# Altium PCB VESC1PCB.PcbDoc
Units mm, origin at the board's own origin, x right, y up, seen from the top; angles counter-clockwise.
Board outline 50 x 50 mm, 2 copper layers (Top Layer, Bottom Layer); 75 components, 42 nets, 238 pads, 17 vias.
Unrouted connection lines stored in the file: 41.
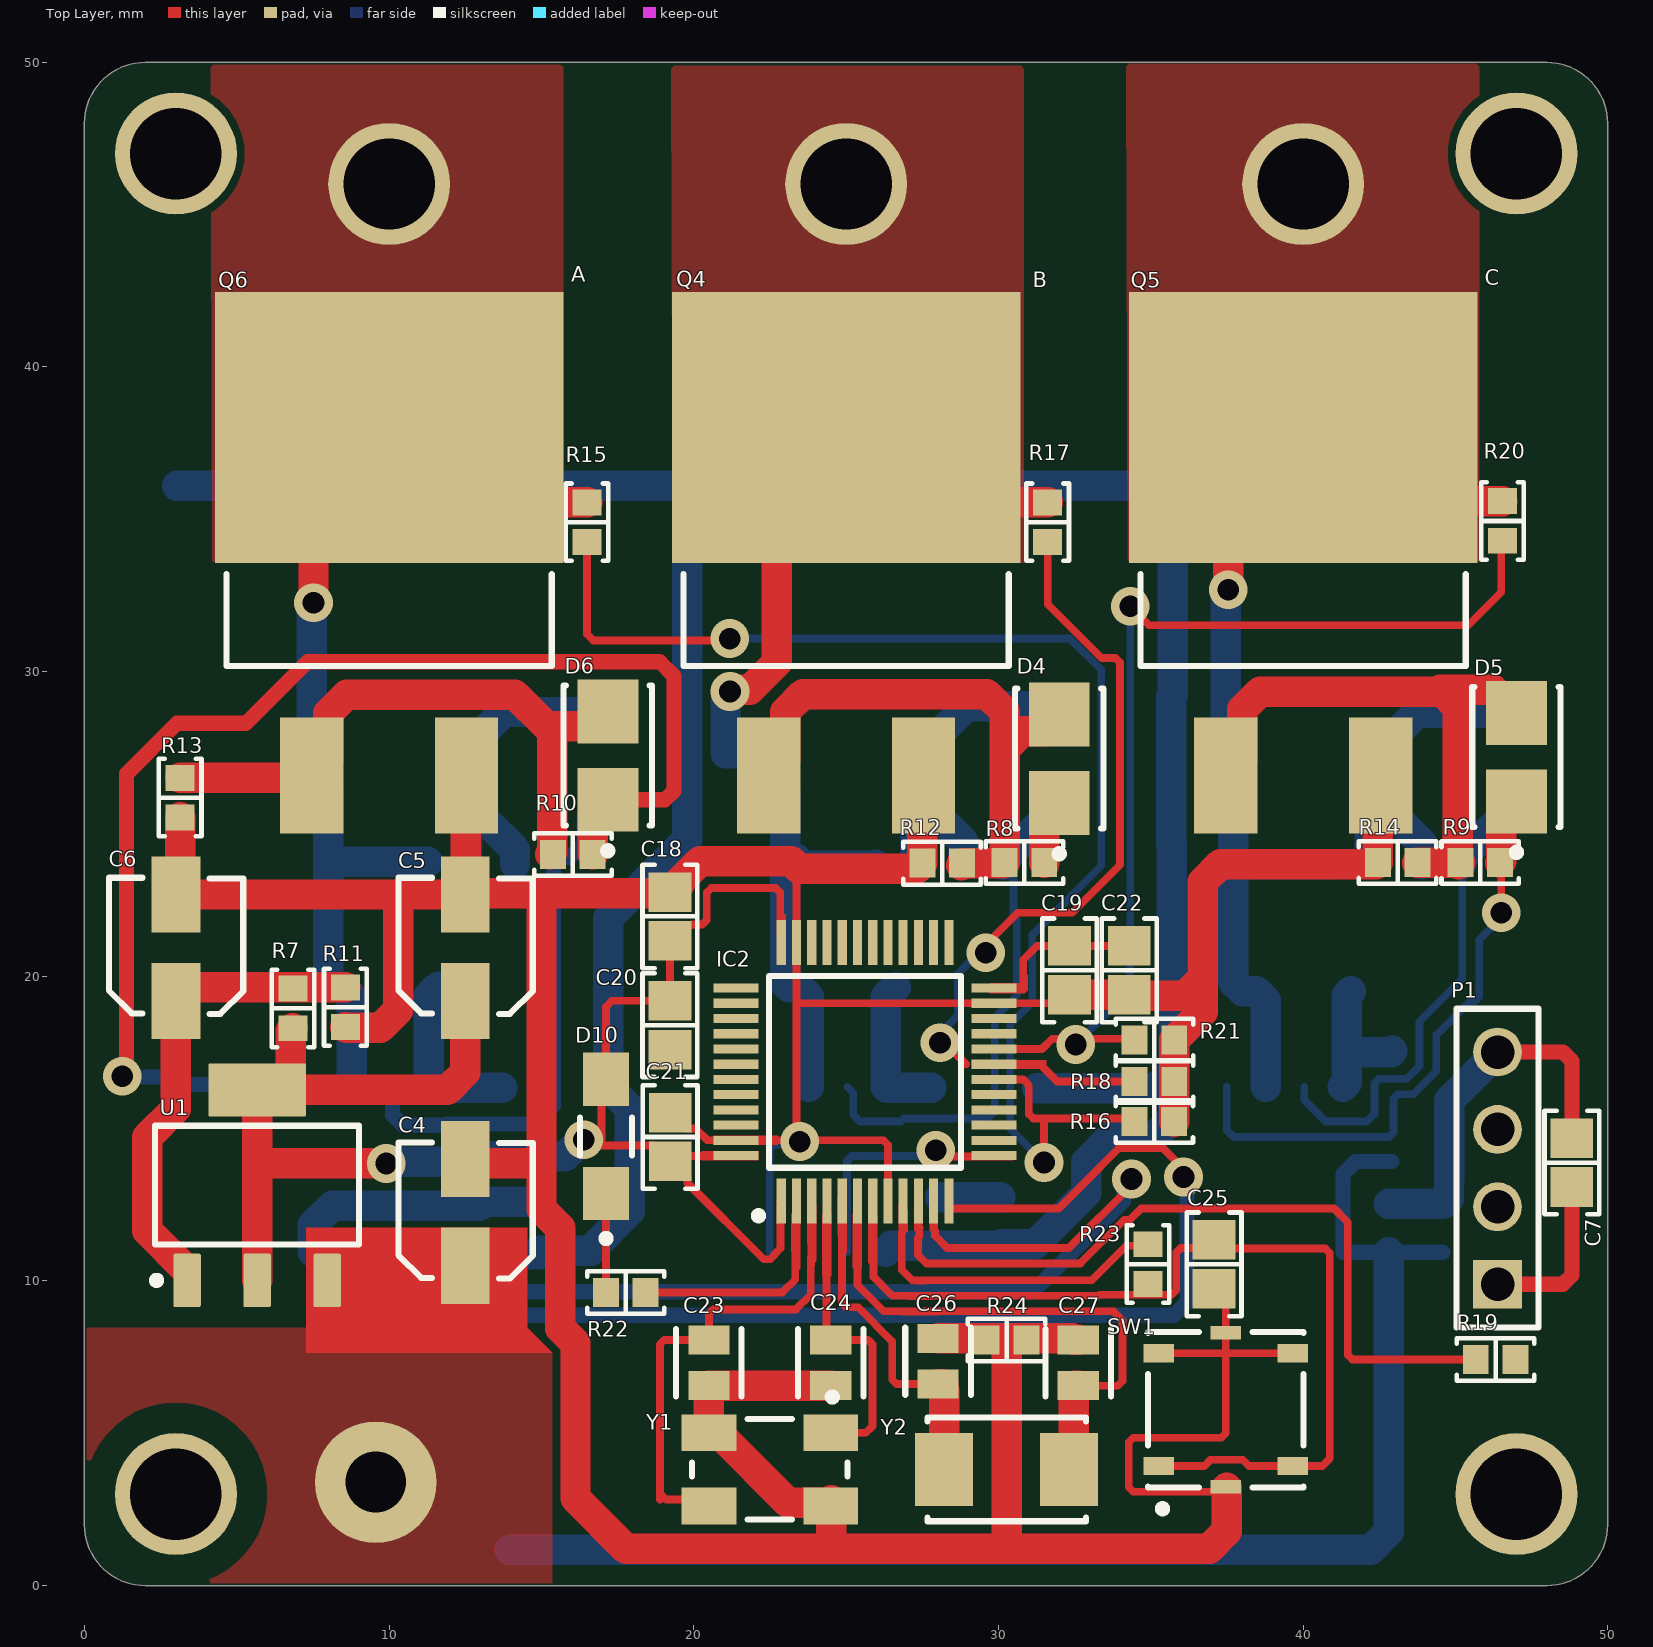
[diagram p0: Top Layer view]
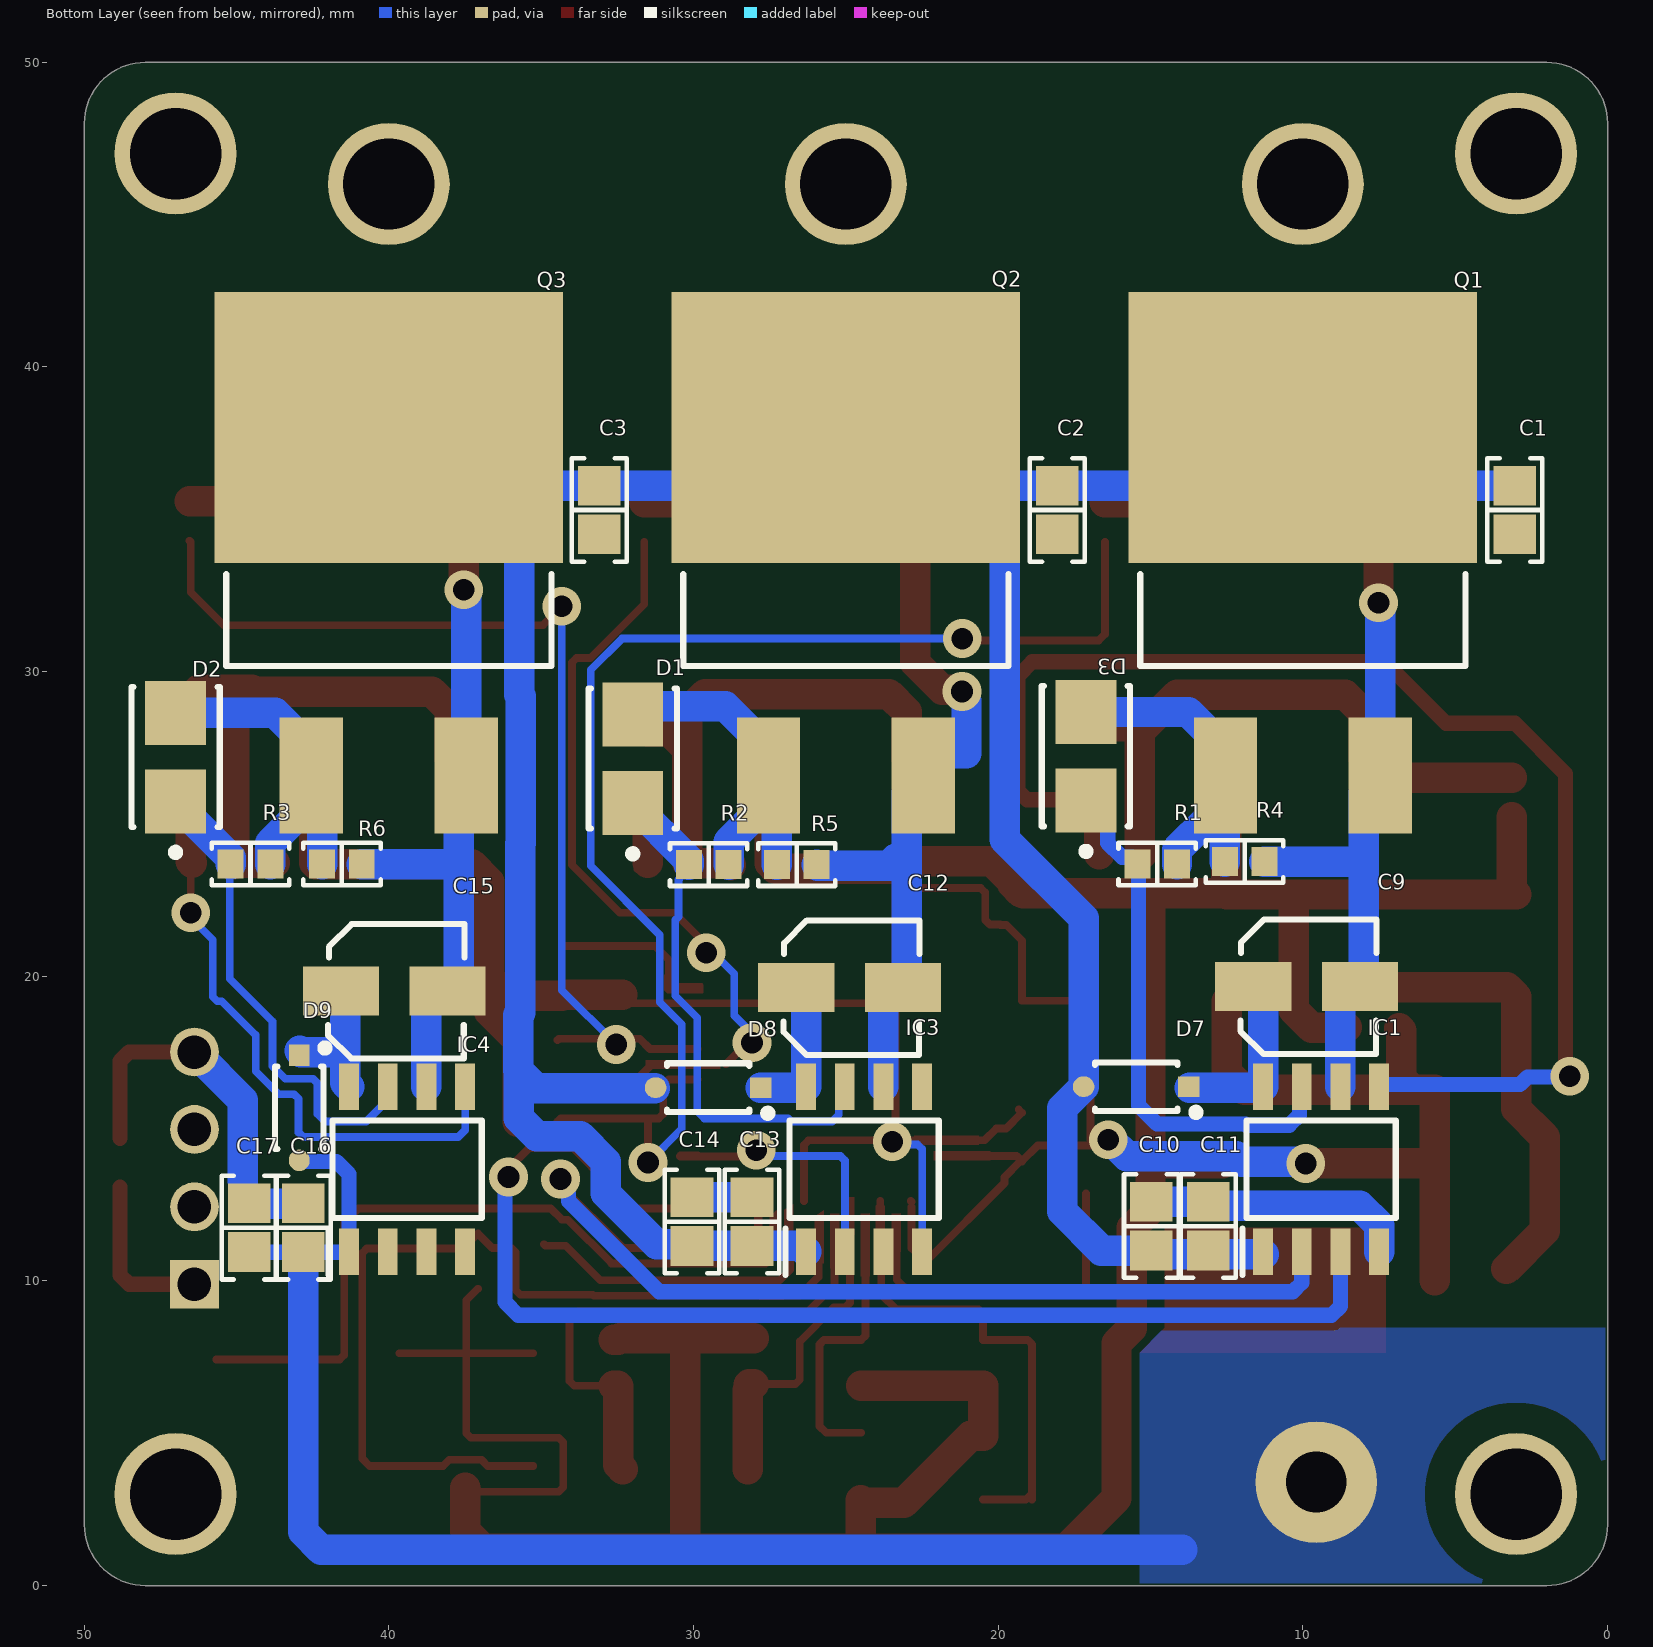
[diagram p1: Bottom Layer view, seen from below]
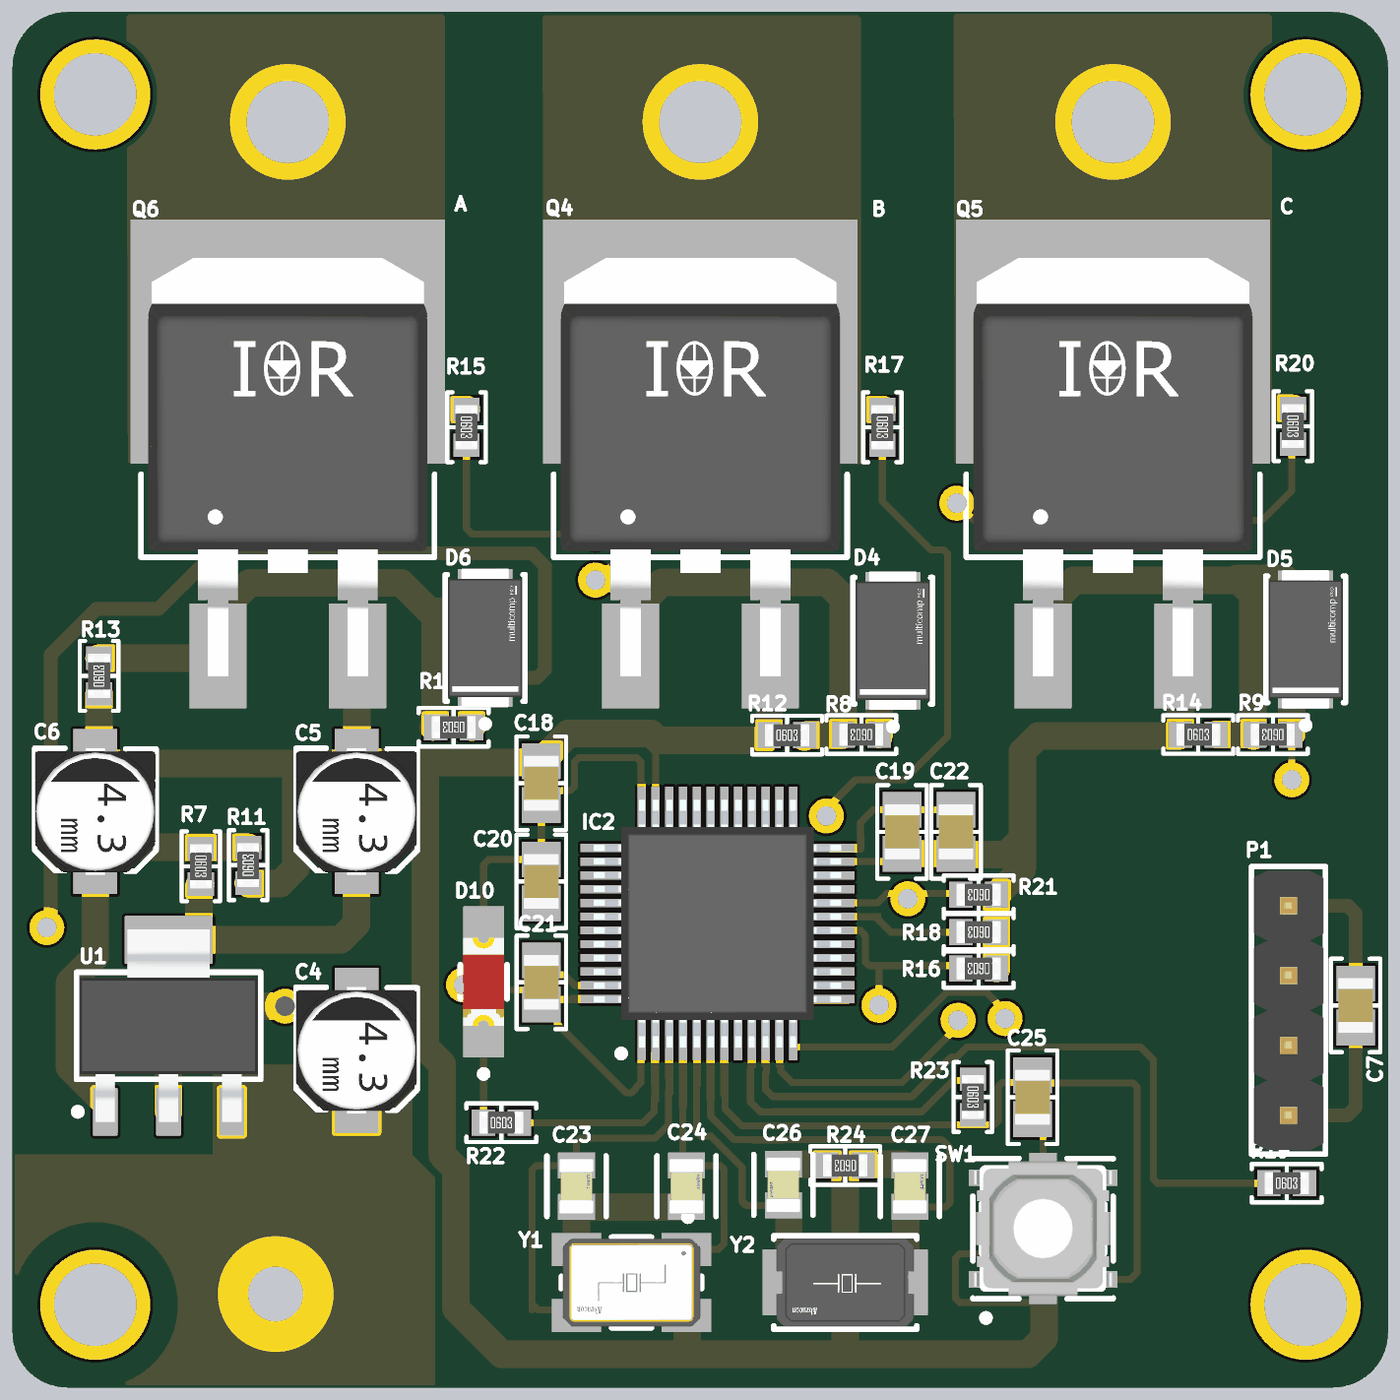
[diagram p2: 3D render of the assembled board from above, using the file's embedded part models]
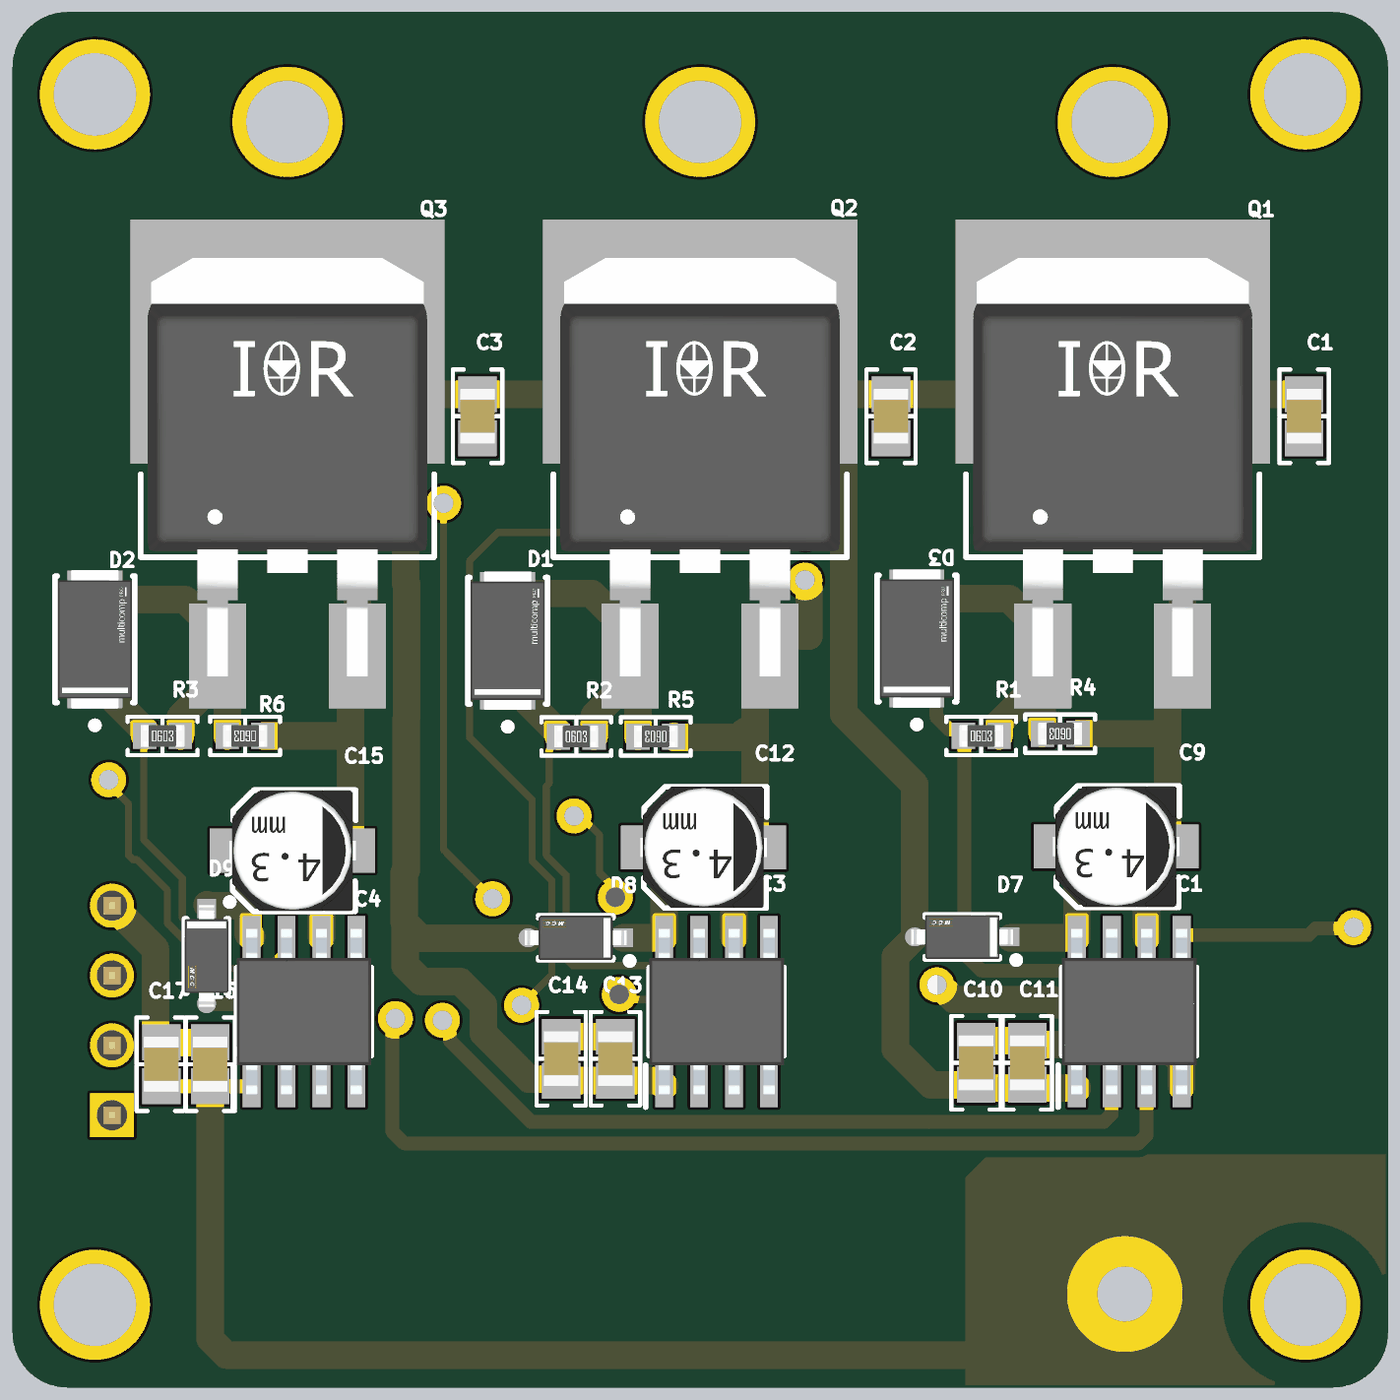
[diagram p3: 3D render of the assembled board from below, using the file's embedded part models]

## Layer stack, top to bottom
Top Solder: solder mask 0.0102, Solder Resist, Dk 3.5
Top Layer: signal copper 0.0356
Dielectric 1: dielectric 0.32, FR-4, Dk 4.8
Bottom Layer: signal copper 0.0356
Bottom Solder: solder mask 0.0102, Solder Resist, Dk 3.5

## Board outline
-0.006,1.994 ccw(c1.994,1.994) 1.994,-0.006 47.994,-0.006 ccw(c47.994,1.994) 49.994,1.994 49.994,47.994 ccw(c47.994,47.994) 47.994,49.994 1.994,49.994 ccw(c1.994,47.994) -0.006,47.994

## Design rules (kind name [scope] priority, off if disabled: settings)
Clearance [All] p1: gap=0.254 ignorepadtopadclearanceinfootprint=FALSE except(0: Arc-Hole Track-Hole SMDPad-Hole THPad-Hole Via-Hole Fill-Hole Poly-Hole Region-Hole Text-Hole)
PolygonConnect PolygonConnect_3 [All vs IsNamedPolygon('C_L01_P006')] p1: thpad.connectstyle=Direct thpad.reliefconductorwidth=0.254 thpad.reliefentries=4 thpad.polygonreliefangle="90 Angle" thpad.airgapwidth=0.254 smdpad.connectstyle=Direct smdpad.reliefconductorwidth=0.254 smdpad.reliefentries=4 smdpad.polygonreliefangle="90 Angle" smdpad.airgapwidth=0.254 via.connectstyle=Relief via.reliefconductorwidth=0.254 via.reliefentries=4 via.polygonreliefangle="90 Angle" via.airgapwidth=0.254
PolygonConnect PolygonConnect_2 [All vs IsNamedPolygon('B_L01_P005')] p2: thpad.connectstyle=Direct thpad.reliefconductorwidth=0.254 thpad.reliefentries=4 thpad.polygonreliefangle="90 Angle" thpad.airgapwidth=0.254 smdpad.connectstyle=Direct smdpad.reliefconductorwidth=0.254 smdpad.reliefentries=4 smdpad.polygonreliefangle="90 Angle" smdpad.airgapwidth=0.254 via.connectstyle=Relief via.reliefconductorwidth=0.254 via.reliefentries=4 via.polygonreliefangle="90 Angle" via.airgapwidth=0.254
PolygonConnect PolygonConnect_1 [All vs IsNamedPolygon('A_L01_P004')] p3: thpad.connectstyle=Direct thpad.reliefconductorwidth=0.254 thpad.reliefentries=4 thpad.polygonreliefangle="90 Angle" thpad.airgapwidth=0.254 smdpad.connectstyle=Direct smdpad.reliefconductorwidth=0.254 smdpad.reliefentries=4 smdpad.polygonreliefangle="90 Angle" smdpad.airgapwidth=0.254 via.connectstyle=Relief via.reliefconductorwidth=0.254 via.reliefentries=4 via.polygonreliefangle="90 Angle" via.airgapwidth=0.254
PolygonConnect [All] p4: connectstyle=Relief reliefconductorwidth=0.254 reliefentries=4 polygonreliefangle="90 Angle" airgapwidth=0.254
RoutingVias [All] p1: holewidth=0.711 width=1.27 viastyle="Through Hole" minholewidth=0.711 minwidth=1.27 maxholewidth=0.711 maxwidth=1.27
SolderMaskExpansion [All] p1: expansion=0.102 istentingtop=FALSE
Width [All] p1: maxlimit=1 minlimit=0.254 preferedwidth=0.5 minimp=50.000000 maximp=50.000000 favimp=50.000000
30 further rules are at their usual default settings.

## Components (designator, comment, footprint, x,y, rotation, side; value= is the part's Value field where it differs from the comment)
C1 "100 µF" "CAP 0805_2012" 3.04,35.3 r270 bottom
C2 "100 µF" "CAP 0805_2012" 18.06,35.3 r270 bottom
C3 "100 µF" "CAP 0805_2012" 33.091,35.3 r270 bottom
C4 "10uF" "CAP ALSMD 4.3MM H5.4MM" 12.5,12.244 r90 top
C5 "100uF" "CAP ALSMD 4.3MM H5.4MM" 12.5,20.93 r90 top
C6 "=Value" "CAP ALSMD 4.3MM H5.4MM" 3,20.93 r90 top
C7 "0.1 µF" "CAP 0805_2012" 48.82,13.88 r90 top
C9 "10 µF" "CAP ALSMD 4.3MM H5.4MM" 9.878,19.658 r180 bottom
C10 "10 µF" "CAP 0805_2012" 14.97,11.795 r270 bottom
C11 "10 µF" "CAP 0805_2012" 13.105,11.795 r270 bottom
C12 "10 µF" "CAP ALSMD 4.3MM H5.4MM" 24.876,19.63 r180 bottom
C13 "10 µF" "CAP 0805_2012" 28.08,11.944 r270 bottom
C14 "10 µF" "CAP 0805_2012" 30.05,11.944 r270 bottom
C15 "10 µF" "CAP ALSMD 4.3MM H5.4MM" 39.82,19.51 r180 bottom
C16 "10 µF" "CAP 0805_2012" 42.81,11.745 r270 bottom
C17 "10 µF" "CAP 0805_2012" 44.586,11.745 r270 bottom
C18 "0.1 µF" "CAP 0805_2012" 19.215,21.96 r270 top
C19 "0.1 µF" "CAP 0805_2012" 32.331,20.192 r90 top
C20 "0.1 µF" "CAP 0805_2012" 19.215,18.39 r90 top
C21 "0.1 µF" "CAP 0805_2012" 19.22,14.72 r270 top
C22 "0.1 µF" "CAP 0805_2012" 34.291,20.192 r90 top
C23 "10pF" FP-C0805C-DN-MFG 20.495,7.31 r270 top value="10 pF"
C24 "10pF" FP-C0805C-DN-MFG 24.495,7.31 r270 top value="10 pF"
C25 "0.1 µF" "CAP 0805_2012" 37.075,10.544 r90 top
C26 "10pF" FP-C0805C-DN-MFG 28.015,7.36 r90 top value="10 pF"
C27 "10pF" FP-C0805C-DN-MFG 32.615,7.31 r270 top value="10 pF"
D1 "1N4007 SMD" FP-1N4007_SMD-IPC_C 31.994,27.14 r90 bottom
D2 "1N4007 SMD" FP-1N4007_SMD-IPC_C 47,27.19 r90 bottom
D3 "1N4007 SMD" FP-1N4007_SMD-IPC_C 17.12,27.22 r90 bottom
D4 "1N4007 SMD" FP-1N4007_SMD-IPC_C 31.994,27.14 r90 top
D5 "1N4007 SMD" FP-1N4007_SMD-IPC_C 47,27.19 r90 top
D6 "1N4007 SMD" FP-1N4007_SMD-IPC_C 17.175,27.24 r90 top
D7 "MBR0560-TP" FP-SOD-123-IPC_C 15.47,16.372 r0 bottom
D8 "MBR0560-TP" FP-SOD-123-IPC_C 29.52,16.34 r0 bottom
D9 "MBR0560-TP" FP-SOD-123-IPC_C 42.94,15.68 r270 bottom
D10 "CMD15-21VRD/TR8" FP-CMD15-21-MFG 17.12,14.74 r90 top
IC1 "IR2101STRPBF" SOIC127P600X175-8N 9.4,13.66 r90 bottom
IC2 "STM32F103C8T7" QFP50P900X900X160-48N 25.62,16.86 r90 top
IC3 "IR2101STRPBF" SOIC127P600X175-8N 24.4,13.66 r90 bottom
IC4 "IR2101STRPBF" SOIC127P600X175-8N 39.4,13.66 r90 bottom
P1 "61300411121" 61300411121 46.38,13.7 r90 top
Q1 "IRF3205STRLPBF" FP-PG-TO263-3-MFG 10,35 r180 bottom
Q2 "IRF3205STRLPBF" FP-PG-TO263-3-MFG 25,35 r180 bottom
Q3 "IRF3205STRLPBF" FP-PG-TO263-3-MFG 40,35 r180 bottom
Q4 "IRF3205STRLPBF" FP-PG-TO263-3-MFG 25,35 r0 top
Q5 "IRF3205STRLPBF" FP-PG-TO263-3-MFG 40,35 r0 top
Q6 "IRF3205STRLPBF" FP-PG-TO263-3-MFG 10,35 r0 top
R1 "10 Ohms" "RES 0603_1608" 14.78,23.68 r180 bottom
R2 "10 Ohms" "RES 0603_1608" 29.5,23.66 r180 bottom
R3 "10 Ohms" "RES 0603_1608" 44.54,23.68 r180 bottom
R4 "2k Ohms" "RES 0603_1608" 11.91,23.76 r0 bottom
R5 "2k Ohms" "RES 0603_1608" 26.61,23.66 r0 bottom
R6 "2k Ohms" "RES 0603_1608" 41.54,23.68 r0 bottom
R7 "10 Ohms" "RES 0603_1608" 6.84,18.94 r270 top
R8 "10 Ohms" "RES 0603_1608" 30.85,23.728 r180 top
R9 "10 Ohms" "RES 0603_1608" 45.81,23.728 r180 top
R10 "10 Ohms" "RES 0603_1608" 16.029,23.997 r180 top
R11 "16 Ohms" "RES 0603_1608" 8.56,18.98 r90 top
R12 "2k Ohms" "RES 0603_1608" 28.15,23.707 r0 top
R13 "2k Ohms" "RES 0603_1608" 3.14,25.86 r90 top
R14 "2k Ohms" "RES 0603_1608" 43.1,23.73 r0 top
R15 "7k Ohms" "RES 0603_1608" 16.495,34.9 r270 top
R16 "2k Ohms" "RES 0603_1608" 35.113,15.226 r180 top
R17 "7k Ohms" "RES 0603_1608" 31.614,34.9 r270 top
R18 "2k Ohms" "RES 0603_1608" 35.117,16.546 r180 top
R19 "16 Ohms" "RES 0603_1608" 46.314,7.42 r0 top
R20 "7k Ohms" "RES 0603_1608" 46.54,34.94 r270 top
R21 "2k Ohms" "RES 0603_1608" 35.117,17.905 r180 top
R22 "510 Ohms" "RES 0603_1608" 17.765,9.62 r0 top
R23 "16 Ohms" "RES 0603_1608" 34.905,10.55 r270 top
R24 "1M Ohms" "RES 0603_1608" 30.264,8.06 r180 top
SW1 "EVQ-PLMA15" FP-EVQ-PLMA15-MFG 37.455,5.77 r90 top
U1 "LM1117MPX-ADJ/NOPB" DCY0004A_N 5.666,13.14 r90 top
Y1 "ABM3B-155-12.800MHZ-T" FP-ABM3B-MFG 22.495,3.81 r180 top
Y2 "ABM3-8.000MHZ-D2Y-T" FP-ABM3-MFG 30.265,3.81 r180 top

## Footprints (in the part's own frame and the unit in brackets; to place one, negate y for a bottom-side part, rotate by r counter-clockwise, add the part's x,y. Pads: shape width x height; smd on the part's side, far side on the other; paste and mask are expansions set on the pad)
61300411121 [mm] "Pin Header, pitch 2.54 mm, THT, Vertical, single row, 4p"
  rect 1.6x1.6 hole 1.1: 1(-3.81,0)
  round 1.6 hole 1.1: 2(-1.27,0) 3(1.27,0) 4(3.81,0)
  silkscreen extent -5.23,-1.35 5.23,1.35, body extent -5.08,-1.27 5.08,1.27, height 8.57
"CAP 0805_2012" [mm] "Chip Capacitor, 2-Leads, Body 2.00x1.20mm, IPC Medium Density"
  rect 1.3x1.4 smd: 1(-0.8,0) 2(0.8,0)
  silkscreen extent -1.7,-0.9 1.7,0.9, body extent -1,-0.64 1,0.64, height 1.26
"CAP ALSMD 4.3MM H5.4MM" [mm] "Aluminum Electrolytic Capacitor, Body 4.30x4.30x5.40mm, IPC Low Density"
  rect 2.5x1.6 smd: 1(-1.75,0) 2(1.75,0)
  silkscreen extent -2.17,-2.21 2.3,2.2, body extent -2.3,-2.2 2.3,2.2, height 5.4
DCY0004A_N [mm] "SOT223, 4-Leads, Body 6.7x3.7mm, Pitch 2.3mm, IPC Medium Density"
  rrect11% 1.75x0.9 smd: 1(-3.125,2.3) 2(-3.125,0) 3(-3.125,-2.3)
  rrect6% 1.75x3.2 smd: 4(3.125,0)
  silkscreen extent -3.25,-3.35 1.95,3.42, body extent -3.5,-3.25 3.5,3.25, height 1.62
FP-1N4007_SMD-IPC_C [mm]
  rect 2.1x2 smd paste+0 mask+0: 1(-1.45,0) 2(1.45,0)
  silkscreen extent -3.25,-1.45 2.3,1.45, body extent -2.52,-1.35 2.52,1.35, height 2.62
FP-ABM3-MFG [mm]
  rect 1.9x2.4 smd paste+0 mask+0: 1(-2.05,0) 2(2.05,0)
  silkscreen extent -2.6,-1.7 2.6,1.7, body extent -3.1,-1.8 3.1,1.8, height 0.25
FP-ABM3B-MFG [mm]
  rect 1.8x1.2 smd paste+0 mask+0: 1(-2,-1.2) 2(2,-1.2) 3(2,1.2) 4(-2,1.2)
  silkscreen extent -2.55,-2.5 2.55,1.65, body extent -3,-1.9 3,1.9, height 0.25
FP-C0805C-DN-MFG [mm]
  rect 0.95x1.35 smd paste+0 mask+0: 1(-0.75,0) 2(0.75,0)
  silkscreen extent -1.1,-1.07 1.1,1.07, body extent -1.4,-0.85 1.4,0.85, height 0.25
FP-CMD15-21-MFG [mm]
  rect 1.75x1.5 smd paste+0 mask+0: 1(-1.875,0) 2(1.875,0)
  silkscreen extent -3.47,-0.85 0.63,0.85, body extent -2.85,-0.95 2.85,0.95, height 0.25
FP-EVQ-PLMA15-MFG [mm]
  rect 0.45x1 smd paste+0 mask+0: 1(-2.525,0) 2(2.525,0)
  rect 0.6x1 smd paste+0 mask+0: A(-1.85,2.2) A'(-1.85,-2.2) B(1.85,2.2) B'(1.85,-2.2)
  silkscreen extent -3.37,-2.55 2.55,2.55, body extent -2.85,-2.8 2.85,2.8, height 0.25
FP-PG-TO263-3-MFG [mm]
  rect 2.08x3.81 smd paste+0 mask+0: 1(-2.54,-8.417) 3(2.54,-8.417)
  rect 11.43x8.89 smd paste+0 mask+0: 2(0,3.013)
  silkscreen extent -5.34,-4.82 5.34,-1.81, body extent -5.08,-9.2 5.08,6.05, height 5.09
FP-SOD-123-IPC_C [mm]
  rect 0.708x0.682 smd paste+0 mask+0: 1(-1.725,0)
  rrect100% 0.708x0.682 smd paste+0 mask+0: 2(1.725,0)
  silkscreen extent -2.09,-0.8 1.35,0.97, body extent -1.85,-0.8 1.85,0.8, height 1.35
QFP50P900X900X160-48N [mm]
  rect 1.475x0.3 smd: 1(-4.238,2.75) 2(-4.238,2.25) 3(-4.238,1.75) 4(-4.238,1.25) 5(-4.238,0.75) 6(-4.238,0.25) 7(-4.238,-0.25) 8(-4.238,-0.75) 9(-4.238,-1.25) 10(-4.238,-1.75) 11(-4.238,-2.25) 12(-4.238,-2.75) 25(4.238,-2.75) 26(4.238,-2.25) 27(4.238,-1.75) 28(4.238,-1.25) 29(4.238,-0.75) 30(4.238,-0.25) 31(4.238,0.25) 32(4.238,0.75) 33(4.238,1.25) 34(4.238,1.75) 35(4.238,2.25) 36(4.238,2.75)
  rect 0.3x1.475 smd: 13(-2.75,-4.238) 14(-2.25,-4.238) 15(-1.75,-4.238) 16(-1.25,-4.238) 17(-0.75,-4.238) 18(-0.25,-4.238) 19(0.25,-4.238) 20(0.75,-4.238) 21(1.25,-4.238) 22(1.75,-4.238) 23(2.25,-4.238) 24(2.75,-4.238) 37(2.75,4.238) 38(2.25,4.238) 39(1.75,4.238) 40(1.25,4.238) 41(0.75,4.238) 42(0.25,4.238) 43(-0.25,4.238) 44(-0.75,4.238) 45(-1.25,4.238) 46(-1.75,4.238) 47(-2.25,4.238) 48(-2.75,4.238)
  silkscreen extent -4.85,-3.15 3.15,3.62, body extent -4.5,-4.5 4.5,4.5, height 1.6
"RES 0603_1608" [mm] "Chip Resistor, 2-Leads, Body 1.60x0.80mm, IPC Medium Density"
  rect 0.85x0.95 smd: 1(-0.65,0) 2(0.65,0)
  silkscreen extent -1.27,-0.7 1.27,0.7, body extent -0.8,-0.4 0.8,0.4, height 0.45
SOIC127P600X175-8N [mm]
  rect 1.525x0.65 smd: 1(-2.712,1.905) 2(-2.712,0.635) 3(-2.712,-0.635) 4(-2.712,-1.905) 5(2.712,-1.905) 6(2.712,-0.635) 7(2.712,0.635) 8(2.712,1.905)
  silkscreen extent -3.47,-2.45 1.6,2.58, body extent -3,-2.45 3,2.45, height 1.75

## Part data
C1 C2 C3: library part PMK212BBJ107MG-T, "CAP CER 100UF 2.5V X5R 0805", Device Package="0805 (2012 Metric)", Manufacturer="Taiyo Yuden", Operating Temperature="-55°C ~ 85°C", Supplier Part Number 1=587-3978-1-ND, Temperature Coefficient=X5R, Tolerance=±20%, Voltage - Rated=2.5V, Applications="SMPS Filtering", Capacitance="100 µF", ComponentLink1Description=Datasheet, ComponentLink1URL="https://ds.yuden.co.jp/TYCOMPAS/ut/detail?pn=PMK212BBJ107MG-T  &u=M", ComponentLink2Description="DigiKey Link", ComponentLink2URL=https://www.digikey.com/en/products/detail/taiyo-yuden/PMK212BBJ107MG-T/4950524, LastUpdated="23.05.2022 12:57:57", Lifecycle Status=Active, Minimum Order=1, Mounting Type="Surface Mount, MLCC", Package / Case="0805 (2012 Metric)", Packaging=TapeAndReel, Part Number=PMK212BBJ107MG-T, Part Status=Active, partid=7580, Price=0.60, Series=M, Size / Dimension="0.079\" L x 0.049\" W (2.00mm x 1.25mm)", Supplier 1=DigiKey, Thickness (Max)="0.053\" (1.35mm)"
C4 C5 C6: library part UWX1C100MCL1GB, "CAP ALUM 10UF 20% 16V SMD", Part Number=UWX1C100MCL1GB
C7 C18 C19 C20 C21 C22 C25: library part HMK212BJ104KG-T, "CAP CER 0.1UF 100V X5R 0805", Device Package="0805 (2012 Metric)", Manufacturer="Taiyo Yuden", Operating Temperature="-55°C ~ 85°C", Supplier Part Number 1=587-5863-1-ND, Temperature Coefficient=X5R, Tolerance=±10%, Voltage - Rated=100V, Applications="SMPS Filtering", Capacitance="0.1 µF", ComponentLink1Description=Datasheet, ComponentLink1URL=https://www.yuden.co.jp/productdata/catalog/mlcc01_e.pdf, ComponentLink2Description="DigiKey Link", ComponentLink2URL=https://www.digikey.com/en/products/detail/taiyo-yuden/HMK212BJ104KG-T/4970697, Features="High Voltage", LastUpdated="23.05.2022 12:58:06", Lifecycle Status=Active, Minimum Order=1, Mounting Type="Surface Mount, MLCC", Package / Case="0805 (2012 Metric)", Packaging=TapeAndReel, Part Number=HMK212BJ104KG-T, Part Status=Active, partid=3711, Price=0.04, Series=M, Size / Dimension="0.079\" L x 0.049\" W (2.00mm x 1.25mm)", Supplier 1=DigiKey, Thickness (Max)="0.053\" (1.35mm)"
C9 C12 C15: library part UWX1C100MCL1GB, "CAP ALUM 10UF 20% 16V SMD", Device Package="Radial, Can - SMD", Lifetime @ Temp.="2000 Hrs @ 85°C", Manufacturer=Nichicon, Operating Temperature="-40°C ~ 85°C", Ripple Current @ High Frequency="34.5 mA @ 10 kHz", Ripple Current @ Low Frequency="23 mA @ 120 Hz", Supplier Part Number 1=493-2100-1-ND, Tolerance=±20%, Voltage - Rated="16 V", Applications="General Purpose", Capacitance="10 µF", ComponentLink1Description=Datasheet, ComponentLink1URL=https://products.nichicon.co.jp/en/pdf/XJA043/e-uwx.pdf, ComponentLink2Description="DigiKey Link", ComponentLink2URL=https://www.digikey.com/en/products/detail/nichicon/UWX1C100MCL1GB/589841, Height - Seated (Max)="0.213\" (5.40mm)", LastUpdated="23.05.2022 13:34:57", Lifecycle Status=Active, Minimum Order=1, Mounting Type="Surface Mount", Package / Case="Radial, Can - SMD", Packaging=TapeAndReel, Part Number=UWX1C100MCL1GB, Part Status=Active, partid=7030, Polarization=Polar, Price=0.06, Series=UWX, Size / Dimension="0.157\" Dia (4.00mm)", Supplier 1=DigiKey, Surface Mount Land Size="0.169\" L x 0.169\" W (4.30mm x 4.30mm)"
C10 C11 C13 C14 C16 C17: library part C2012X6S1C106K125AC, "CAP CER 10UF 16V X6S 0805", Part Number=C2012X6S1C106K125AC
C23 C24 C26 C27: library part CMP-2007-00219-2, "Capacitor; Ceramic; Cap 10 pF; Tol 5%; Vol-Rtg 50 VDC; SMT; 0805; COG (NPO); Tape&Reel", Capacitance="10 pF", Manufacturer=KEMET, Manufacturer Part Number=C0805C100J5GACTU, Package=C0805C-DN, Temperature="-55°C to +125°C", Temperature Characteristic=C0G, Temperature Coefficient=30ppm/°C, Temperature Range High=+125°C, Temperature Range Low=-55°C, Tolerance=0.05, Voltage Rating="50 V", Automotive=No, Category=Cap, ComponentLink2Description=Datasheet, ComponentLink2URL=https://content.kemet.com/datasheets/KEM_C1003_C0G_SMD.pdf, Device Class L1="Passive Components", Device Class L2=Capacitors, Device Class L3="Ceramic Capacitors", Digikey Description="Capacitor; Ceramic; Cap 10 pF; Tol 5%; Vol-Rtg 50 VDC; SMT; 0805; COG (NPO); Tape&Reel", Height=0.88mm, Lead Free=Yes, Material=Ceramic, Mouser Description="KEMET - C0805C100J5GACTU - CAP, MLCC, C0G/NP0, 10PF, 50V, 0805", Octopart=https://octopart.com/c0805c100j5gactu-kemet-104357, RoHS=TRUE, Ipc Land Pattern Name=CAPC200125X78
D1 D2 D3 D4 D5 D6: library part CMP-12389-000001-1, "Rectifier, 1Kv, 1A, Do-214Ac Rohs Compliant: Yes"
D7 D8 D9: library part CMP-56206-000010-1, "DIODE SCHOTTKY 60V 500MA SOD123", Average Rectified Current=500mA, Capacitance=30pF, Forward Voltage=700mV, Max Operating Temperature=150°C, Max Repetitive Reverse Voltage (Vrrm)=60V, Max Reverse Current=200uA, Max Surge Current=5.5A, Min Operating Temperature=-55°C, Package Quantity=1, Current Rating=500mA, Element Configuration=Single, Lead Free="Lead Free", Max Reverse Leakage Current=200uA, Max Reverse Voltage (DC)=60V, Mount="Surface Mount", Number of Pins=2, Output Current=500mA, Packaging="Tape and Reel", Peak Non-Repetitive Surge Current=5.5A, Polarity=Standard, Radiation Hardening=No, RoHS Compliant=Yes, Voltage Rating (DC)=60V
D10: library part CMP-53976-000002-1, "LED RED DIFFUSED 1206 SMD", Colour=Red, Forward Current=20mA, Forward Voltage=2V, Manufacturer=VCC, Package=CMD15-21, Power Dissipation=105mW, Reverse Voltage=5V, Temperature="-40°C to +85°C", Temperature Range High=+85°C, Temperature Range Low=-40°C, Automotive=No, Category=Diode, ComponentLink2Description=Datasheet, ComponentLink2URL=https://www.vcclite.com/wp-content/uploads/wpallimport/files/files/CMD1521SeriesRev1.pdf, Device Class L1=Optoelectronics, Device Class L2=LEDs, Device Class L3=unset, Digikey Description="LED RED DIFFUSED 1206 SMD", Height=1.3mm, Lead Free=Yes, Led Orientation="Top View", Luminous Intensity=4mcd, Manufacturer Part Number=CMD15-21VRD/TR8, Mouser Description="Standard LEDs - SMD RED DIFFUSED", Octopart=https://octopart.com/cmd15-21vrd%2Ftr8-vcc-26668835, Peak Emmision Wavelength=640nm, RoHS=TRUE
IC1 IC3 IC4: "Integrated Circuit", Manufacturer_Name=Infineon, Mouser Part Number=942-IR2101STRPBF, Arrow Part Number=IR2101STRPBF, Arrow Price/Stock=https://www.arrow.com/en/products/ir2101strpbf/infineon-technologies-ag?region=nac, Datasheet Link=http://uk.rs-online.com/web/p/products/1248778, Height=1.75mm, Manufacturer_Part_Number=IR2101STRPBF, Mouser Price/Stock=https://www.mouser.co.uk/ProductDetail/Infineon-IR/IR2101STRPBF?qs=ellYJlE8XiER7yumWzaY8w%3D%3D
IC2: "Integrated Circuit", Manufacturer_Name=STMicroelectronics, Mouser Part Number=511-STM32F103C8T7, Arrow Part Number=STM32F103C8T7, Arrow Price/Stock=https://www.arrow.com/en/products/stm32f103c8t7/stmicroelectronics, Datasheet Link=http://www.st.com/st-web-ui/static/active/en/resource/technical/document/datasheet/CD00161566.pdf, Height=1.6mm, Manufacturer_Part_Number=STM32F103C8T7, Mouser Price/Stock=https://www.mouser.co.uk/ProductDetail/STMicroelectronics/STM32F103C8T7?qs=ZGWq6n3A68KjK%2FbZ7Ii58w%3D%3D
P1: library part CMP-1502-01064-1, "THT Vertical Pin Header WR-PHD, Pitch 2.54 mm, Single Row, 4 pins", Contact Resistance=20mOhm, Manufacturer="Wurth Elektronik", Operating Temperature=-40to105degC, Rated Current=3A, Withstanding Voltage=500VAC, Working Voltage=250VAC, Datasheet URL=https://katalog.we-online.de/em/datasheet/6130xx11121.pdf, Gender=Male, Manufacturer URL=http://www.we-online.de, Mounting Technology=THT, Orientation=Vertical, Package Reference=61300411121, Packaging=Bag, Part Number=61300411121, Pin Number=4, Pitch=2.54mm, Publisher=WurthElektronik, Row Number=Single
Q1 Q2 Q3 Q4 Q5 Q6: library part CMP-32901-000011-1, "MOSFET N-CH 55V 110A D2PAK", Continuous Drain Current=110A, Drain To Source Breakdown Voltage=55V, Drain To Source Resistance=8mΩ, Gate To Source Voltage=20V, Manufacturer="Infineon Technologies", Max Forward Diode Voltage=1.3V, Max Junction Temp=+175°C, Package=PG-TO263-3, Power Dissipation=200W, Pulse Drain Current=390A, Temperature="-55°C to +175°C", Temperature Range Low=-55°C, Input Capacitace At Vds="3247pF @ 25V", Automotive=No, Category=Trans, ComponentLink2Description=Datasheet, ComponentLink2URL=https://www.infineon.com/dgdl/irf3205spbf.pdf?fileId=5546d462533600a4015355defac9190c, Depletion Mode=False, Device Class L1="Discrete Semiconductors", Device Class L2=Transistors, Device Class L3=MOSFETs, Digikey Description="MOSFET N-CH 55V 110A D2PAK", Drain To Source Voltage=55V, Gate Charge At Vgs="146nC @ 10V", Height=5.084mm, Lead Free=Yes, Manufacturer Part Number=IRF3205STRLPBF, Number of Channels=1, Number Of N Channels=1, Octopart=https://octopart.com/irf3205strlpbf-infineon-65873335, Reverse Recovery Charge=143nC, Reverse Recovery Time=69ns, RoHS=TRUE, Rthja Max=40°C/W, Standoff Height=0mm, Temperature Range High=+175°C, Threshold Vgs Max=4V, Threshold Vgs Min=2V, Turn Off Delay Time=50ns, Turn On Delay Time=14ns
R1 R2 R3 R4 R5 R6 R7 R8 R9 R10 R11 R12 R13 R14 R15 R16 R17 R18 R19 R20 R21 R22 R23 R24: library part RNCS0603BKE10K0, "RES 10K OHM 0.1% 1/16W 0603", Device Package="0603 (1608 Metric)", Manufacturer="Stackpole Electronics Inc", Operating Temperature="-55°C ~ 155°C", Power (Watts)="0.063W, 1/16W", Ratings=AEC-Q200, Resistance="10 kOhms", Supplier Device Package=0603, Supplier Part Number 1=RNCS0603BKE10K0CT-ND, Temperature Coefficient=±25ppm/°C, Tolerance=±0.1%, ComponentLink1Description=Datasheet, ComponentLink1URL=https://www.seielect.com/catalog/sei-rncs_rnch.pdf, ComponentLink2Description="DigiKey Link", ComponentLink2URL=https://www.digikey.com/en/products/detail/stackpole-electronics-inc/RNCS0603BKE10K0/1708836, Composition="Thin Film", Features="Anti-Corrosive, Automotive AEC-Q200, Moisture Resistant", Height - Seated (Max)="0.022\" (0.55mm)", LastUpdated="23.05.2022 13:14:49", Lifecycle Status=Active, Minimum Order=1, Number of Terminations=2, Package / Case="0603 (1608 Metric)", Packaging=TapeAndReel, Part Number=RNCS0603BKE10K0, Part Status=Active, partid=4838, Price=0.08, Series=RNCS, Size / Dimension="0.061\" L x 0.031\" W (1.55mm x 0.80mm)", Supplier 1=DigiKey
SW1: library part CMP-05618-000006-1, "SWITCH TACTILE SPST-NO 0.02A 15V", Contact Current Rating=20mA, Contact Resistance=50mΩ, Manufacturer="Panasonic Electronic Components", Operating Force=2.6N, Package=0, Temperature="-20°C to +70°C", Temperature Range High=+70°C, Temperature Range Low=-20°C, Voltage Rating Dc=15V, Automotive=No, Category=Switch, ComponentLink2Description=Datasheet, ComponentLink2URL=https://datasheet.ciiva.com/8164/atv0000ce2-8164994.pdf, Device Class L1=Electromechanical, Device Class L2=Switches, Device Class L3="Tactile Switches", Digikey Description="SWITCH TACTILE SPST-NO 0.02A 15V", Electromechanical Life=200000Cycles, Height=1.7mm, Lead Free=Yes, Manufacturer Part Number=EVQ-PLMA15, Mount="Surface Mount", Mouser Description="Tactile Switches FLAT ACT 2.6NF 4.6x3.4x1.5mm", Octopart=https://octopart.com/evq-plma15-panasonic-39850235, RoHS=TRUE, Throw Configuration=SPST-NO
U1: library part CMP-0062-01644-4, "800mA Low-Dropout Linear Regulator, 4-pin SOT-223, Pb-Free", Manufacturer="Texas Instruments", PackageTopMarking=XYTT*N03A, PowerWise=N, Code_JEDEC=TO-261-AA, Code_IPC=SOT223-4, ComponentLink1Description="Datasheet URL", ComponentLink1URL=http://www.ti.com/general/docs/lit/getliterature.tsp?genericPartNumber=LM1117-N&fileType=pdf, CompType="LDO IC", High-Reliability=Y, PackageDescription="Molded SOT-223, 6.50 x 3.56 x 1.6mm Body, 4 Lead, 2.3mm Pitch", PackageReference=DCY0004A, PartNumber=LM1117MPX-ADJ/NOPB, PinCount=4, RoHS=Y
Y1: library part CMP-27762-002684-1, "Crystal 12.8MHz ±10ppm 15pF SMD-4 5mm x 3.2mm", Case/Package=SMD/SMT, ESR (Equivalent Series Resistance)=70R, Frequency=12.8MHz, Frequency Stability=20ppm, Frequency Tolerance=10ppm, Load Capacitance=15pF, Max Operating Temperature=85°C, Min Operating Temperature=-40°C, Package Quantity=1000, Resistor Type=Ceramic, Tolerance=50ppm, Height=0.043inch, Lead Free="Lead Free", Length=0.197inch, Mount="Surface Mount", Packaging="Tape and Reel", REACH SVHC="No SVHC", RoHS Compliant=Yes, Series=ABM3B, Termination=SMD/SMT, Width=0.126inch
Y2: library part CMP-2000-05033-2, "Crystal 8MHz ±20ppm 18pF SMD-2 5mm x 3.2mm", Case/Package=CSMD, ESR (Equivalent Series Resistance)=140R, Frequency=8MHz, Frequency Stability=30ppm, Frequency Tolerance=20ppm, Load Capacitance=18pF, Max Operating Temperature=85°C, Min Operating Temperature=-40°C, Package Quantity=1000, Resistor Type=Ceramic, Series Resistance=500R, Depth=3.2mm, Height=0.051inch, Lead Free="Lead Free", Length=5mm, Mount="Surface Mount", Number of Pins=2, Packaging="Tape and Reel", Radiation Hardening=No, RoHS Compliant=Yes, Termination=SMD/SMT, Tolerance=20ppm, Width=3.2mm

## Free pads (board coordinates)
  round 4 hole 3: 29(3,3) 29(3,47) 29(10,46) 29(25,46) 29(40,46) 29(47,3) 29(47,47)
  round 4 hole 2: 29(9.56,3.39)

## Via types
v1: diameter 1.27, hole 0.711, Top Layer to Bottom Layer, 17 vias

## Nets (pads, with @x,y where several pads share a name; then routed paths per layer and width w, separated by ;. In a path a pad name is that pad's centre, name@x,y a point inside that pad or via, vN(x,y) a via of type N, cw(c..) or ccw(c..) an arc to the next point about the centre after c; other vN are vias at no path point)
+3.3: C5.1 C7.1 C18.2 C19.2 C20.2 C21.2 C22.2 D10.2 IC2.1 IC2.9 IC2.24 IC2.36 IC2.48 P1.1 R7.2 R23.1 U1.2 U1.4 | length 74.3
  Top Layer w0.254: v1(16.389,14.629) 16.575,14.443 18.697,14.443 C21.2 ; v1@16.97,14.629 16.97,16.465 D10.2 17.12,19 17.31,19.19 C20.2 19.215,21.14 C18.2 19.738,21.683 19.924,21.683 19.937,21.696 20.271,21.696 20.42,21.845 20.42,22.743 20.569,22.891 22.69,22.891 22.839,22.743 22.839,21.88 ; 20.363,14.096 19.396,14.096 C21.2 ; IC2.1@22.842,12.42 22.842,11.071 22.651,10.881 22.651,10.859 22.503,10.711 22.292,10.711 19.793,13.21 19.793,13.397 19.27,13.92 C21.2 ; IC2.1@22.847,12.599 IC2.1 ; 26.848,11.689 26.848,11.621 26.821,11.594 26.821,10.363 27.168,10.016 27.279,10.016 27.282,10.013 27.598,10.013 27.601,10.016 33.061,10.016 34.198,11.153 34.858,11.153 R23.1 ; 30.815,19.658 30.815,20.535 31.272,20.992 C19.2 C22.2
  Top Layer w0.5: P1.1 48.527,9.89 48.82,10.183 C7.1
  Top Layer w1: U1.2 5.666,13.78 ; R7.2 6.766,18.216 6.766,16.64 U1.4@6.391,16.265 ; v1(9.9,13.854) 5.74,13.854 5.666,13.78 ; C5.1 12.5,16.851 11.914,16.265 U1.4@6.391,16.265 ; 5.666,13.78 U1.4 U1.4@6.391,16.265
  Bottom Layer w0.254: P1.1 P1.1@46.39,9.88
  Bottom Layer w1: v1(9.9,13.854) 9.952,13.905 11.999,13.905 12.189,14.095 15.782,14.095 16.316,14.629 v1(16.389,14.629)
+14.8: C1.1 C2.1 C3.1 C4.1 C10.2 C11.2 C13.2 C14.2 C16.2 C17.2 D7.2 D8.2 D9.2 IC1.1 IC3.1 IC4.1 pad.29@9.56,3.39 Q1.2 Q2.2 Q3.2 U1.3 | length 162.6
  Top Layer w1: U1.3 12.2,10.015 12.5,10.315 C4.1
  Bottom Layer w0.5: IC4.1@41.305,10.932 41.311,10.938 42.81,10.938 C17.2@44.58,10.938 ; IC4.1 41.305,13.509 41.716,13.92 D9.2@42.905,13.92
  Bottom Layer w1: C1.1 8.087,36.1 Q1.2 11.913,36.1 C2.1 Q2.2@21.817,36.1 ; IC1.1@11.285,10.876 C10.2@14.95,10.876 ; 13.964,1.174 42.224,1.174 42.81,1.76 42.81,10.938 C16.2 ; C10.2 16.609,10.995 17.9,12.285 17.9,15.667 D7.2 17.195,21.896 19.785,24.486 19.785,34.068 Q2.2@21.817,36.1 ; IC3.1 26.305,10.97 26.48,11.145 C13.2 C14.2 30.103,11.197 31.207,11.197 32.88,12.87 32.88,13.912 33.719,14.751 35.142,14.751 35.728,15.337 35.728,16.878 ; D8.2@31.265,16.32 35.17,16.32 35.728,16.878 ; Q3.2 38.73,38.013 Q3.2@36.817,36.1 ; Q2.2@21.817,36.1 23.73,38.013 Q2.2 26.913,36.1 C3.1 Q3.2@36.817,36.1 ; 35.728,16.878 35.755,16.906 35.755,18.718 35.68,18.794 35.68,24.351 35.666,24.365 35.666,29.193 35.712,29.239 35.712,34.995 Q3.2@36.817,36.1
A: C9.2 IC1.6 pad.29@10,46 Q1.3 Q6.2 R4.1 R15.1 | length 34.3
  Top Layer w1: v1(7.516,32.26) 7.516,35.416 7.46,35.473 Q6.2 12.463,35.55 R15.1
  Bottom Layer w1: v1(7.516,32.26) 7.516,32.187 7.46,32.131 Q1.3 8,26.043 8,23.806 ; IC1.6 8.765,19.358 8.465,19.658 C9.2 8,19.786 8,23.806 ; R4.1 8.046,23.76 8,23.806
Aemf: IC2.18 R15.2 R16.2 | length 45.6
  Top Layer w0.254: R15.2 16.495,31.225 16.7,31.02 21.114,31.02 v1(21.174,31.08) ; IC2.18 30.814,16.61 30.959,16.465 30.959,16.435 30.994,16.401 30.994,15.48 31.143,15.331 31.605,15.331 ; v1(31.491,13.886) 31.491,15.331 34.358,15.331 R16.2
  Bottom Layer w0.254: v1(21.174,31.08) 32.346,31.08 33.375,30.051 33.375,23.62 31.104,21.349 31.104,19.144 30.384,18.424 30.384,14.993 v1(31.491,13.886)
AH: D3.1 IC1.7 R1.1 | length 17.5
  Bottom Layer w0.5: IC1.7 10.11,16.297 10.11,15.444 10.449,15.106 11.839,15.106 11.884,15.151 14.786,15.151 15.392,15.757 15.392,23.642 R1.1 ; R1.1@15.43,23.73 15.605,23.905 15.937,23.905 16.406,24.374 16.406,25.056 D3.1
AL: D6.1 IC1.5 R10.1 | length 44.1
  Top Layer w0.5: v1(1.24,16.713) 1.38,16.853 1.38,26.64 3.04,28.3 5.3,28.3 7.32,30.32 18.88,30.32 19.35,29.85 19.35,26.083 19.057,25.79 D6.1
  Top Layer w1: R10.1 16.679,25.294 D6.1
  Bottom Layer w0.5: v1(1.24,16.713) 1.263,16.69 2.625,16.69 2.875,16.44 7.42,16.44 7.488,16.372 IC1.5
B: C12.2 IC3.6 pad.29@25,46 Q2.3 Q4.2 R5.1 R17.1 | length 35.8
  Top Layer w1: v1(21.186,29.345) 21.238,29.397 21.831,29.397 22.721,30.287 22.721,35.734 Q4.2 27.463,35.55 R17.1
  Bottom Layer w1: v1(21.186,29.345) 21.135,29.294 21.135,29.134 21.039,29.039 21.039,27.31 21.92,27.31 22.46,26.77 Q2.3 23,26.043 23,19.756 C12.2 23.465,19.63 23.765,19.33 IC3.6 ; 23.358,23.847 23.586,23.62 25.92,23.62 R5.1
Bemf: IC2.19 R17.2 R18.2 | length 25.8
  Top Layer w0.254: v1(28.08,17.815) 28.227,17.815 28.932,17.11 ; v1(29.58,20.771) 29.58,21.027 30.633,22.08 32.415,22.08 33.991,23.656 33.991,30.291 33.842,30.44 33.385,30.44 31.614,32.211 R17.2 ; 31.365,17.102 31.922,16.546 R18.2
  Bottom Layer w0.254: v1(28.08,17.815) 28.08,18.13 28.66,18.71 28.66,20.074 29.356,20.771 v1(29.58,20.771)
BH: D1.1 IC3.7 R2.1 | length 17.3
  Bottom Layer w0.254: IC3.7 25.23,16.177 25.23,15.448 25.449,15.229 26.788,15.229 26.889,15.33 29.643,15.33 29.876,15.563 29.876,18.635 30.596,19.355 30.596,21.844 30.489,21.951 30.489,23.163 30.448,23.205 30.448,23.362 R2.1
  Bottom Layer w1: R2.1 30.15,23.796 31.994,25.64 D1.1
BL: D4.1 IC3.5 R8.1 | length 2.6
  Top Layer w0.254: R8.1 31.71,23.519 R8.1@31.837,23.519
  Top Layer w1: R8.1 31.5,25.196 D4.1
C: C15.2 IC4.6 pad.29@40,46 Q3.3 Q5.2 R6.1 R20.1 | length 33.7
  Top Layer w1: v1(37.54,32.679) 37.54,35.552 Q5.2 42.422,35.59 R20.1
  Bottom Layer w1: v1(37.54,32.679) 37.46,32.599 Q3.3 37.712,26.33 37.712,19.81 38.012,19.51 38.465,19.51 38.765,19.21 IC4.6 ; 38.206,23.68 R6.1
Cemf: IC2.20 R20.2 R21.2 | length 34.7
  Top Layer w0.254: IC2.20 31.426,17.61 31.765,17.949 v1@32.544,17.949 ; v1(32.54,17.759) 32.54,17.945 v1@32.544,17.949 ; v1(34.323,32.14) 34.943,31.52 45.42,31.52 46.5,32.6 46.5,34.25 R20.2 ; R21.2 34.423,17.949 v1@32.544,17.949
  Bottom Layer w0.254: v1(32.54,17.759) 34.323,19.542 v1(34.323,32.14)
CH: D2.1 IC4.7 R3.1 | length 15.9
  Bottom Layer w0.254: IC4.7 40.035,15.935 40.741,15.229 42.089,15.229 42.34,15.48 42.34,16.48 42.489,16.629 43.398,16.629 43.82,17.051 43.82,18.514 45.223,19.917 45.223,23.647 R3.1
  Bottom Layer w1: R3.1 45.19,23.88 47,25.69 D2.1
CL: D5.1 IC4.5 R9.1 | length 20
  Top Layer w0.254: R9.1 46.5,23.688 v1(46.5,22.085)
  Top Layer w1: R9.1 46.5,23.768 46.5,25.24 D5.1
  Bottom Layer w0.254: IC4.5 37.495,14.949 37.723,14.721 42.814,14.721 42.963,14.869 42.963,15.972 43.111,16.121 43.608,16.121 44.37,16.883 44.37,18.065 45.485,19.18 45.626,19.18 45.775,19.329 45.775,21.194 46.5,21.919 v1(46.5,22.085)
GND: C1.2 C2.2 C3.2 C4.2 C5.2 C6.2 C7.2 C10.1 C11.1 C13.1 C14.1 C16.1 C17.1 C18.1 C19.1 C20.1 C21.1 C22.1 C23.2 C24.2 C25.1 C26.2 C27.1 IC1.4 IC2.8 IC2.23 IC2.35 IC2.47 IC3.4 IC4.4 P1.4 Q4.3 Q5.3 Q6.3 R11.1 R12.1 R13.1 R14.1 R16.1 R18.1 R21.1 R24.1 R24.2 SW1.1 SW1.2 SW1.B SW1.B' Y1.2 Y1.4 | length 206.6
  Top Layer w0.254: C21.1@19.32,15.62 C21.1 19.743,14.997 20.063,14.997 20.45,14.61 IC2.47 ; 22.296,14.598 22.308,14.61 v1@23.333,14.61 ; 22.98,23.772 23.347,23.405 23.347,23.102 23.37,23.079 IC2.35 23.37,19.11 ; v1@23.37,14.647 23.37,19.11 ; v1@23.475,14.61 26.221,14.61 26.37,14.461 IC2.8 ; C19.1 32.049,19.11 IC2.23 23.37,19.11 ; SW1.B 37.455,7.62 ; R16.1 35.763,16.546 35.763,17.901 R21.1 ; C25.1 37.455,9.364 SW1.2 37.455,7.62 ; SW1.1 37.18,3.245 37.015,3.08 34.424,3.08 34.275,3.229 34.275,4.701 34.424,4.85 37.307,4.85 37.455,4.999 37.455,7.62 ; SW1.B' 37.455,7.62
  Top Layer w0.5: P1.4 48.527,17.51 48.82,17.217 C7.2
  Top Layer w1: R13.1 3.14,22.82 C6.2 10.3,22.68 ; R11.1 8.587,18.303 9.714,18.303 10.3,18.889 10.3,22.68 ; C4.2 12.634,13.86 15,13.86 ; Q6.3 12.52,26.563 C5.2@12.52,22.7 ; Y1.2@20.495,4.91 20.895,4.91 23.095,2.71 Y1.4@24.395,2.71 ; Y1.2 C23.2 C24.2 ; Y1.4@24.515,2.8 24.515,1.2 ; Q4.3 27.5,26.542 R12.1 27.313,23.52 23.456,23.52 23.204,23.772 20.204,23.772 19.539,23.108 19.539,23.034 19.265,22.76 C18.1 19.175,22.72 15.28,22.72 ; C26.2 29.614,8.11 30.264,8.11 ; 30.264,1.576 30.264,8.11 ; C19.1 C22.1 ; C27.1 32.465,8.06 32.415,8.11 30.914,8.11 30.264,8.11 ; C22.1@34.323,19.36 36.114,19.36 36.7,19.946 ; R16.1 35.767,15.23 R18.1 R21.1 36.7,18.838 36.7,19.946 ; SW1.1@37.495,3.205 37.495,1.786 36.91,1.2 30.264,1.2 24.515,1.2 ; Q5.3 42.45,26.493 R14.1 42.4,23.68 37.286,23.68 36.7,23.094 36.7,19.946 ; 10.3,22.68 C5.2 C5.2@12.52,22.7 ; C5.2@12.52,22.7 12.54,22.72 15.28,22.72 ; 15,13.86 15,22.44 15.28,22.72 ; 15,13.86 15,12.351 15.616,11.735 15.616,8.45 16.115,7.951 16.115,2.86 17.775,1.2 24.515,1.2
  Bottom Layer w0.254: IC3.4 22.495,14.323 22.644,14.472 23.377,14.472 v1(23.475,14.57)
  Bottom Layer w1: IC1.4 7.495,11.832 8.128,12.465 12.975,12.465 C11.1 C10.1 ; C13.1 C14.1 ; C16.1@42.81,12.535 C17.1@44.586,12.535 ; C17.1 44.636,12.545 44.786,12.695 44.786,13.266 44.8,13.28 44.8,15.93 P1.4
HA: IC1.2 IC2.11 | length 35.1
  Top Layer w0.254: 27.918,11.635 27.918,11.479 28.318,11.079 32.306,11.079 34.367,13.14 v1(34.367,13.341)
  Bottom Layer w0.5: IC1.2 10.035,9.937 10.328,9.644 31.128,9.644 34.1,12.616 34.1,12.865 34.367,13.133 v1(34.367,13.341)
HB: IC2.13 IC3.2 | length 9.2
  Top Layer w0.254: v1(27.94,14.284) 28.215,14.284 28.419,14.079 30.438,14.079 30.446,14.087 30.423,14.11 IC2.13
  Bottom Layer w0.254: IC3.2 25.026,10.957 25.026,13.946 25.175,14.095 27.751,14.095 v1(27.94,14.284)
HC: IC2.30 IC4.2
LA: IC1.3 IC2.12 | length 43
  Top Layer w0.254: IC2.12 28.393,12.599 28.393,12.372 31.972,12.372 33.351,13.751 33.351,13.762 33.946,14.357 35.398,14.357 36.074,13.681 v1(36.074,13.406)
  Bottom Layer w0.5: IC1.3 8.765,9.162 9.058,8.87 35.754,8.87 36.189,9.304 36.189,13.291 v1(36.074,13.406)
LB: IC2.29 IC3.3
LC: IC2.31 IC4.3
LED_RED: IC2.2 R22.2 | length 5.6
  Top Layer w0.254: R22.2 22.905,9.62 23.326,10.041 23.326,10.554
NetC6_1: C6.1 R7.1 R11.2 U1.1 | length 15.5
  Top Layer w1: U1.1@3.316,10.39 2.066,11.64 2.066,14.718 3,15.652 3,19.33 3.3,19.63 6.84,19.63 R11.2
NetC9_1: C9.1 D7.1 IC1.8 | length 5.7
  Bottom Layer w1: IC1.8 11.305,19.358 11.605,19.658 C9.1 ; IC1.8@11.48,16.34 D7.1@13.713,16.34
NetC12_1: C12.1 D8.1 IC3.8 | length 4.9
  Bottom Layer w1: C12.1 26.605,19.63 26.305,19.33 IC3.8 26.337,16.34 D8.1
NetC15_1: C15.1 D9.1 IC4.8 | length 4.7
  Bottom Layer w1: IC4.8 41.437,16.505 41.437,17.51 ; C15.1 41.437,19.378 41.437,17.51 ; D9.1@42.92,17.545 42.885,17.51 41.437,17.51
NetD1_2: D1.2 Q2.1 R2.2 R5.2 | length 11.5
  Bottom Layer w1: R5.2 Q2.1@27.26,25.718 ; R2.2 28.85,24.408 27.54,25.718 27.54,27.448 28.952,28.86 31.724,28.86 D1.2
NetD2_2: D2.2 Q3.1 R3.2 R6.2 | length 12.3
  Bottom Layer w1: R6.2 42.19,26.233 Q3.1 ; R3.2 43.89,24.368 42.54,25.718 Q3.1 ; D2.2 43.732,28.64 42.54,27.448 Q3.1
NetD3_2: D3.2 Q1.1 R1.2 R4.2 | length 11.5
  Bottom Layer w1: R4.2 Q1.1@12.56,25.698 ; R1.2 14.13,24.156 13.109,25.178 13.08,25.178 Q1.1@12.56,25.698 ; D3.2 13.762,28.67 12.54,27.448 Q1.1 12.54,25.718 Q1.1@12.56,25.698
NetD4_2: D4.2 Q4.1 R8.2 R12.2 | length 18.7
  Top Layer w1: Q4.1 23,27.123 23,28.674 23.586,29.26 29.614,29.26 30.2,28.674 30.2,27.454 ; R12.2@28.777,23.639 R12.2@28.845,23.707 ; R12.2 R12.2@28.845,23.707 ; D4.2 31.994,28.54 31.494,28.04 30.786,28.04 30.2,27.454 ; R12.2@28.845,23.707 30.179,23.707 R8.2 30.2,27.454
NetD5_2: D5.2 Q5.1 R9.2 R14.2 | length 19.5
  Top Layer w1: Q5.1 38,27.123 38,28.754 38.586,29.34 44.554,29.34 ; R14.2 R9.2@45.158,23.73 ; R9.2@45.112,23.68 R9.2 R9.2@45.158,23.73 ; D5.2 47,28.69 46.5,29.19 46.45,29.19 46.24,29.4 44.494,29.4 45.08,28.814 45.08,23.808 R9.2@45.158,23.73
NetD6_2: D6.2 Q6.1 R10.2 R13.2 | length 20.9
  Top Layer w1: R13.2 7.387,26.51 8,27.123 8,28.634 8.607,29.242 14.128,29.242 15.17,28.2 15.355,28.2 ; R10.2@15.288,24.006 15.355,24.073 15.355,28.2 ; D6.2 16.685,28.2 15.355,28.2
NetD10_1: D10.1 R22.1 | length 3.2
  Top Layer w0.254: R22.1 17.12,9.624 D10.1
NetR19_1: IC2.10 R19.1 | length 24.7
  Top Layer w0.254: 27.41,11.745 27.401,11.736 27.401,11.456 27.359,11.414 27.359,10.844 27.633,10.571 32.689,10.571 34.124,12.006 34.313,12.006 34.682,12.375 41.012,12.375 41.46,11.927 41.46,7.569 41.609,7.42 42.513,7.42 ; 42.554,7.42 R19.1
NSRT: C25.2 IC2.7 R23.2 SW1.A SW1.A' | length 30.2
  Top Layer w0.254: 25.896,10.611 25.896,10.129 26.517,9.508 27.069,9.508 27.072,9.505 27.808,9.505 27.812,9.508 33.272,9.508 33.308,9.544 34.905,9.544 35.685,9.544 35.834,9.693 35.834,10.93 35.983,11.079 36.6,11.079 37.075,11.554 37.569,11.06 40.727,11.06 40.875,10.911 40.875,4.17 40.625,3.92 SW1.A' 38.224,3.92 38.018,4.126 36.959,4.126 36.753,3.92 SW1.A
OSC8-1: C26.1 IC2.5 Y2.2 | length 10.2
  Top Layer w0.254: 24.861,11.468 24.861,9.279 25.01,9.13 25.39,9.13 26.515,8.005 26.515,6.759 26.664,6.61 C26.1 ; IC2.5@24.866,12.618 IC2.5
  Top Layer w1: C26.1 28.165,6.61 28.19,6.585 28.19,6.435 28.215,6.41 Y2.2
OSC8-2: C27.2 IC2.6 Y2.1 | length 16.3
  Top Layer w0.254: 25.369,10.546 25.369,9.87 26.239,9 26.858,9 26.861,8.997 28.019,8.997 28.022,9 33.771,9 34.066,8.705 34.066,6.709 33.917,6.56 C27.2
  Top Layer w1: Y2.1 32.465,3.96 32.465,6.535 32.49,6.56 C27.2
OSC32-1: C23.1 IC2.3 Y1.3 | length 15.3
  Top Layer w0.254: 18.885,2.82 18.885,7.911 19.034,8.06 C23.1 20.495,8.913 20.644,9.062 23.35,9.062 23.834,9.547 23.834,10.514 23.845,10.525 23.845,10.768 23.865,10.789 23.865,11.682 ; 18.885,3.03 19.095,2.82 Y1.3@20.495,2.82 ; IC2.3 23.87,12.449 IC2.3@23.893,12.426
OSC32-2: C24.1 IC2.4 Y1.1 | length 8.1
  Top Layer w0.254: 24.353,10.558 24.353,8.202 C24.1 25.717,8.06 25.865,7.911 25.865,5.23 25.645,5.01 Y1.1
Sigal: R19.2
SWDCLK: IC2.37 P1.3
SWDIO: IC2.34 P1.2
pads on no net: IC2.14 IC2.15 IC2.16 IC2.17 IC2.21 IC2.22 IC2.25 IC2.26 IC2.27 IC2.28 IC2.32 IC2.33 IC2.38 IC2.39 IC2.40 IC2.41 IC2.42 IC2.43 IC2.44 IC2.45 IC2.46

## Polygon pours and split planes (outlines as drawn)
+14.8 on Bottom Layer "+14.8_L02_P001" (solid, pour order 1): 0.08,8.46 14.54,8.46 15.36,7.64 15.36,0.08 0.08,0.08
C on Top Layer "C_L01_P006" (solid, pour order 6): 34.245,33.588 34.28,33.623 45.775,33.623 45.775,49.845 45.68,49.94 34.2,49.94
B on Top Layer "B_L01_P005" (solid, pour order 5): 19.305,33.528 19.34,33.563 30.835,33.563 30.835,49.785 30.74,49.88 19.26,49.88
A on Top Layer "A_L01_P004" (solid, pour order 4): 4.185,33.568 4.22,33.603 15.715,33.603 15.715,49.825 15.62,49.92 4.14,49.92
+14.8 on Top Layer "+14.8_L01_P000" (solid, pour order 0): 0.08,8.46 14.54,8.46 15.36,7.64 15.36,0.08 0.08,0.08

## Other copper
Top Layer:
  pour cut-out: 3,0 cw(c3,3) 0,3 cw(c3,3) 3,6 cw(c3,3) 6,3 cw(c3,3)
  pour cut-out: 3,0 cw(c3,3) 0,3 cw(c3,3) 3,6 cw(c3,3) 6,3 cw(c3,3)
  pour cut-out: 3,0 cw(c3,3) 0,3 cw(c3,3) 3,6 cw(c3,3) 6,3 cw(c3,3)
  region net Bemf: 29.12,17.24 29.12,16.96 31.452,16.96 31.54,16.872 31.571,16.902 31.571,17.24
  region net HA: 27.731,12.337 27.74,12.328 27.74,11.622 27.94,11.622 27.956,11.606 28.011,11.661 28.011,12.101
  region net OSC8-1: 24.725,12.749 25.026,12.749 25.026,10.934 24.988,10.895 24.974,10.909 24.748,10.909 24.748,11.469 24.728,11.489
  region net OSC32-1: 23.718,12.467 24.019,12.466 24.019,10.651 23.981,10.613 23.967,10.626 23.741,10.626 23.741,11.187 23.721,11.207
  region net NetR19_1: 27.22,12.363 27.229,12.354 27.229,11.648 27.428,11.648 27.445,11.632 27.5,11.687 27.5,12.127
  region net +3.3: 26.72,12.506 26.72,11.614 27.019,11.614 27.02,11.613 27.02,12.337
  region net NSRT: 25.72,12.313 25.721,12.312 25.721,10.583 26.02,10.583 26.02,12.127
  region net +3.3: 29.674,19.46 29.692,19.442 30.862,19.442 30.96,19.54 30.96,20.04 30.76,20.04 30.74,20.06 30.7,20.02 30.7,19.76 29.72,19.76 29.68,19.72
  region net LED_RED: 23.192,12.21 23.494,12.21 23.494,10.395 23.455,10.356 23.442,10.37 23.215,10.37 23.215,10.93 23.195,10.95
  region net +3.3: 23.02,21.36 22.728,21.36 22.72,21.352 22.72,22.04 23.02,22.04
  region net GND: 20.644,14.76 22.76,14.76 22.76,14.461 22.759,14.46 20.644,14.46
  region net +3.3: 22.12,14.26 22.12,13.96 20.26,13.96 20.26,14.26
  region net OSC8-2: 25.215,12.21 25.215,10.41 25.515,10.41 25.515,12.21
  region net OSC32-2: 24.215,12.21 24.215,10.15 24.506,10.15 24.515,10.159 24.515,12.21
  region net +14.8: 7.272,11.745 7.272,7.64 15.36,7.64 14.54,8.46 14.54,11.745
  pour cut-out: 0,3.197 0,0 3.366,0 3.392,0.026 3.36,0.057 3.36,3.18
Bottom Layer:
  pour cut-out: 3,0 cw(c3,3) 0,3 cw(c3,3) 3,6 cw(c3,3) 6,3 cw(c3,3)
  pour cut-out: 0,3.197 0,0 3.366,0 3.392,0.026 3.36,0.057 3.36,3.18

## Silkscreen, mask and mechanical layers (free items; w line width, h text height)
Top Overlay:
  text "A" at 15.969,42.784 h0.5
  text "C" at 45.962,42.684 h0.5
  text "B" at 31.132,42.604 h0.5
Mechanical 1:
  the board outline again, w0.4